# EAGLE board wyrbondr (EAGLE 6.1)
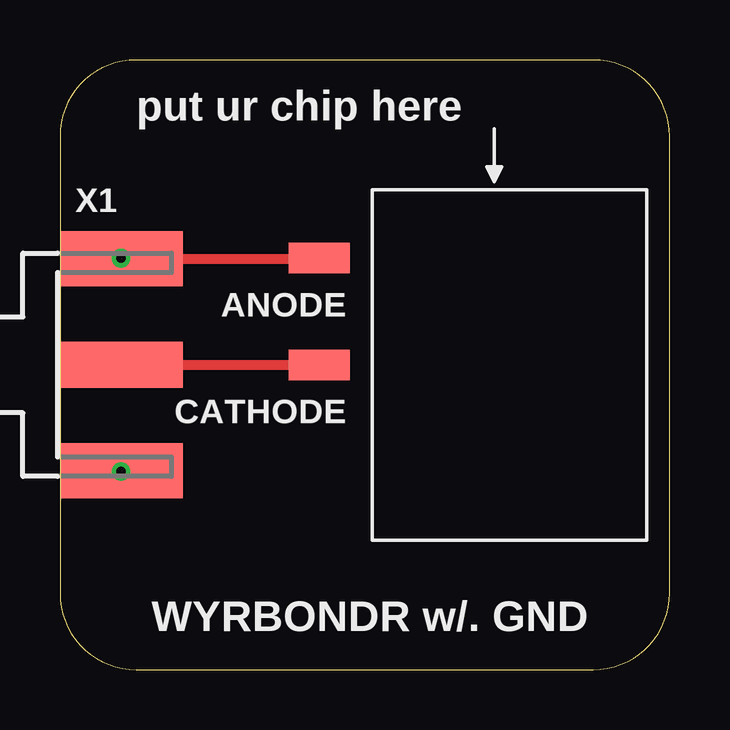
[diagram p0: board, top side]
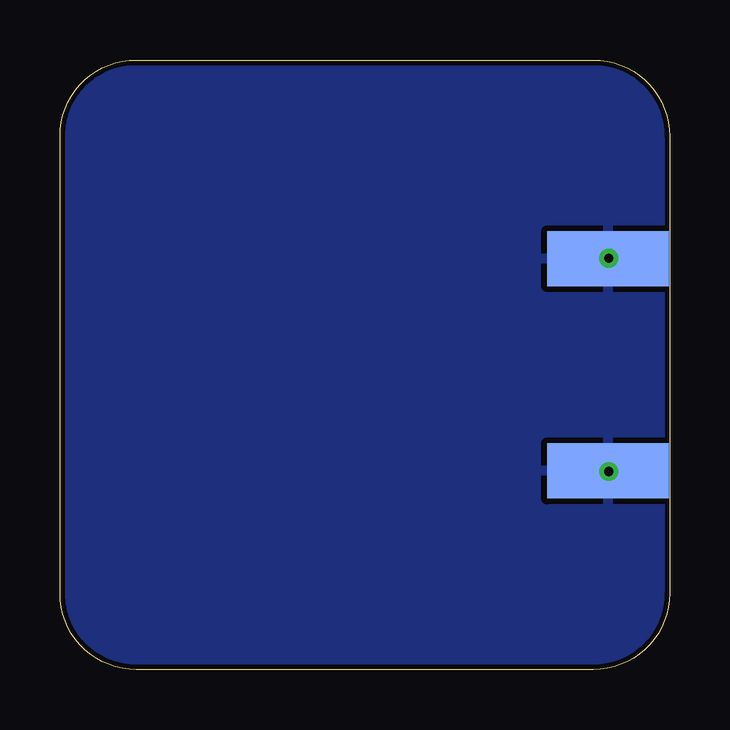
[diagram p1: board, bottom side, seen from below]

Size 25.4 x 25.4 mm. Coordinates in mm from the lower left corner, seen from the top.
Outline: 0,22.23 0,3.17 arc90 3.17,0 22.23,0 arc90 25.4,3.17 25.4,22.23 arc90 22.23,25.4 3.17,25.4 arc90 0,22.23
Copper layers (1*16): Top 0.035mm / dielectric 1.5mm / Bottom 0.035mm
Design rules: minimum track width 10mil, minimum drill 24mil, track to track 8mil, track to pad 8mil, pad to pad 8mil, via to via 8mil, smd to smd 8mil, copper to edge 8mil, drill to drill 8mil, minimum pad ring 10mil, minimum via ring 8mil, stop-mask expansion 4mil, vias tented up to drill 0mil, thermal gap 10mil

## Footprints (pad centres in the part's own frame; a part is rotated, then mirrored left to right if it is on the bottom)
SMD1,27-2,54 = smd 1.27 x 2.54: 1 0,0
J502-ND-142-0711-871/876 = smd 5.08 x 1.905: 1 2.565,0 | smd 5.08 x 2.286: G@1 2.565,4.42; G@2 2.565,-4.42 | smd 5.08 x 2.286 bottom: G@3 2.565,4.42; G@4 2.565,-4.42

## Placement (x,y rotation side)
ANODE  [SMD1,27-2,54]  10.79,17.14 90 top
CATHODE  [SMD1,27-2,54]  10.79,12.7 90 top
X1  SMA-142-0711-871/876  [J502-ND-142-0711-871/876]  0,12.7 0 top

## Library data of the parts
ANODE CATHODE = wirepad
X1 = con-coax; MF: JOHNSON COMPONENTS; MPN: 142-0711-871; OC_FARNELL: unknown; OC_NEWARK: 01C1639

## Nets
CATHODE: CATHODE.1 X1.1
GND: ANODE.1 X1.G@1 X1.G@2 X1.G@3 X1.G@4

## Tracks (layer width: path | path; a pad name or v marks a point on that pad's centre or on a via)
CATHODE
  Top 0.406: X1.1 CATHODE.1
GND  (via drill 0.38)  (2 unrouted)
  Top 0.406: X1.G@1 10.77,17.12 ANODE.1
  other vias: 2.54,8.26 2.54,17.14
  pour Bottom: 0,25.4 25.4,25.4 25.4,0 0,0

## Text on the board
tPlace: put ur chip here | WYRBONDR w/. GND